# Altium PCB FRONT-UNIT-3.5.PcbDoc
Units mm, origin at the board's own origin, x right, y up, seen from the top; angles counter-clockwise.
Board outline 187 x 80.47 mm, 2 copper layers (Top Layer, Top, Bottom Layer, Bottom); 108 components, 75 nets, 427 pads, 124 vias.
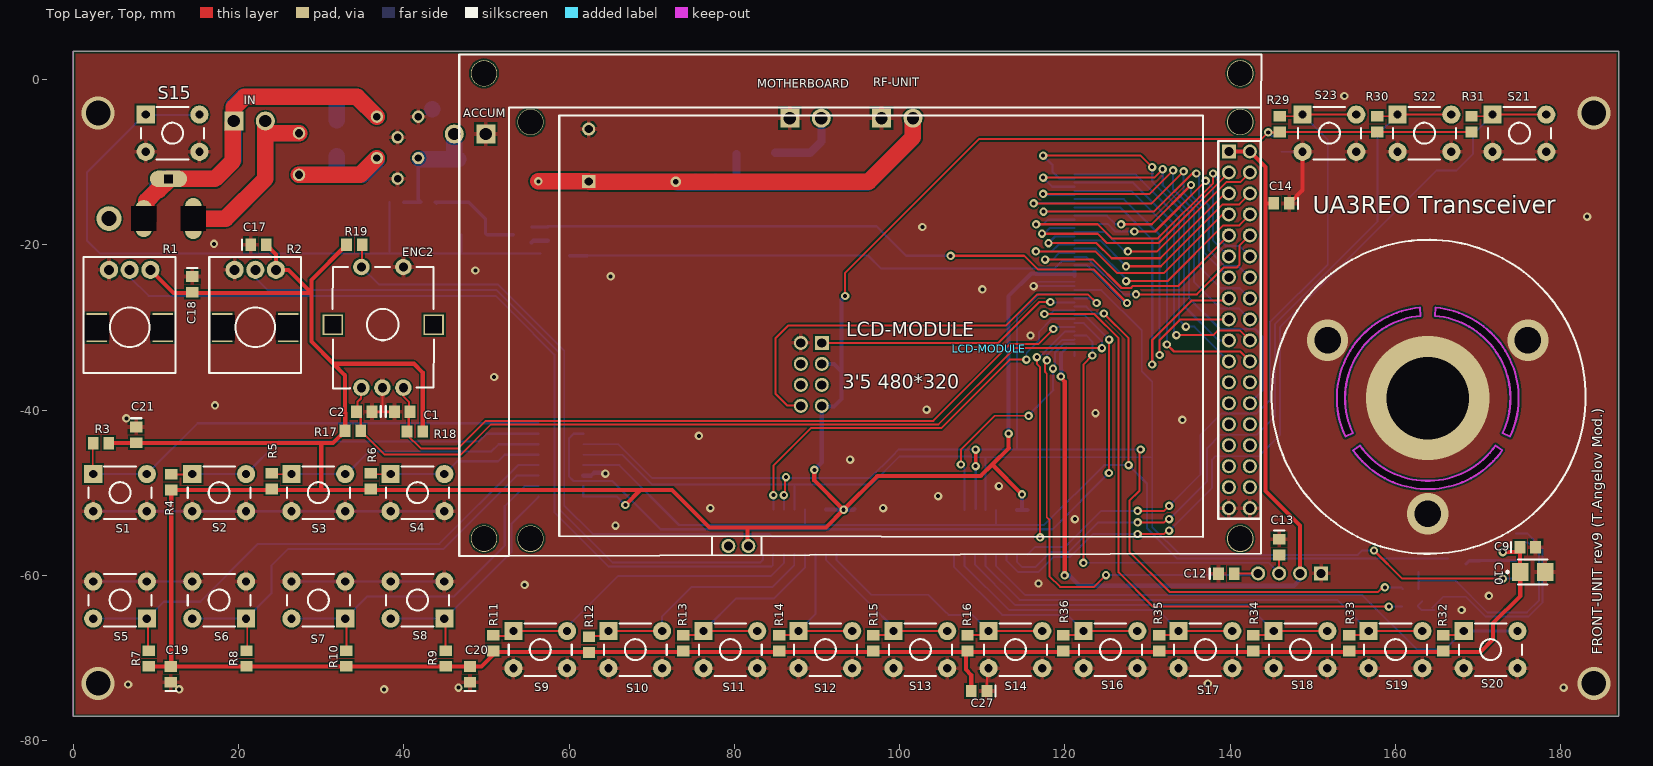
[diagram p0: Top Layer, Top view]
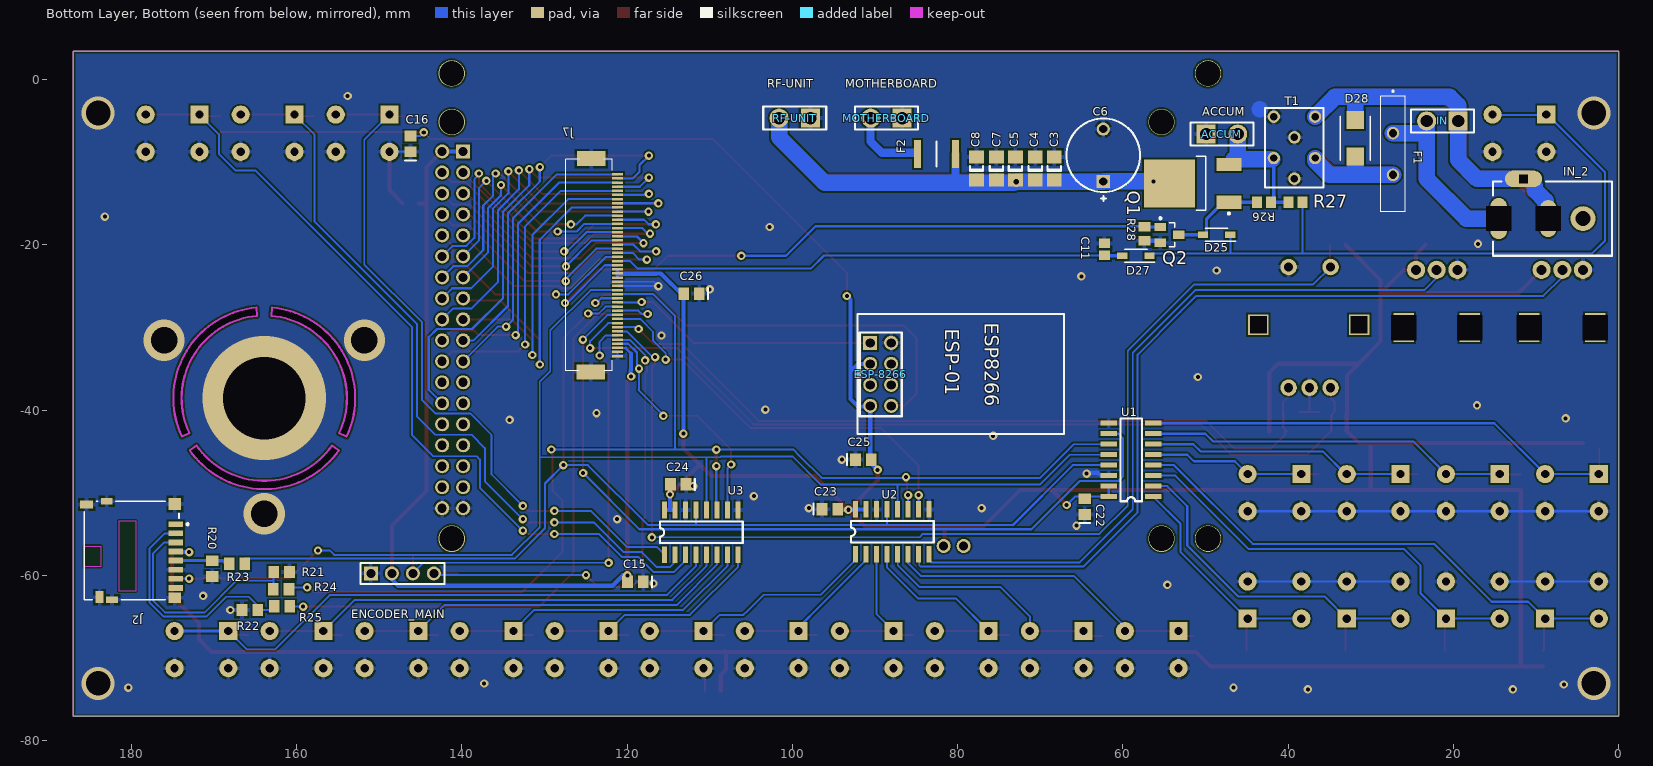
[diagram p1: Bottom Layer, Bottom view, seen from below]

## Layer stack, top to bottom
Top Solder, Top Mask: solder mask 0.0102, Solder Resist, Dk 3.5
Top Layer, Top: signal copper 0.0356
Dielectric 1: dielectric 0.32, FR-4, Dk 4.8
Bottom Layer, Bottom: signal copper 0.0356
Bottom Solder, Bot Mask: solder mask 0.0102, Solder Resist, Dk 3.5

## Board outline
0,-77.07 187,-77.07 187,3.4 0,3.4
cut-out: 154.889,-44.879 ccw(c163.9,-38.57) 172.911,-44.879 172.091,-44.306 cw(c163.9,-38.57) 155.708,-44.306
cut-out: 164.772,-28.608 cw(c163.9,-38.57) 172.963,-42.797 173.869,-43.219 ccw(c163.9,-38.57) 164.859,-27.612
cut-out: 153.931,-43.219 cw(c163.9,-38.57) 162.941,-27.612 163.028,-28.608 ccw(c163.9,-38.57) 154.837,-42.797

## Design rules (kind name [scope] priority, off if disabled: settings)
BoardOutlineClearance [All] p1: gap=0.2 ignorepadtopadclearanceinfootprint=FALSE except(0.4: Arc-SplitBarrior Arc-SplitContinuation Track-SplitBarrior Track-SplitContinuation SMDPad-SplitBarrior SMDPad-SplitContinuation THPad-SplitBarrior THPad-SplitContinuation Via-SplitBarrior Via-SplitContinuation Fill-SplitBarrior Fill-SplitContinuation Poly-SplitBarrior Poly-SplitContinuation Region-SplitBarrior Region-SplitContinuation Text-SplitBarrior Text-SplitContinuation)
Clearance [All] p1: gap=0.2 ignorepadtopadclearanceinfootprint=FALSE
Clearance "Clearance Bottom Layer" [OnLayer('Bottom Layer')] p2: gap=0.203 ignorepadtopadclearanceinfootprint=TRUE except(0.254: Arc-Text Track-Text SMDPad-Text THPad-Text Via-Text Fill-Text Poly-Text Region-Text Text-Text)
Clearance "Clearance Top Layer" [OnLayer('Top Layer')] p3: gap=0.203 ignorepadtopadclearanceinfootprint=TRUE except(0.254: Arc-Text Track-Text SMDPad-Text THPad-Text Via-Text Fill-Text Poly-Text Region-Text Text-Text)
HoleSize [All] p1: absolutevalues=TRUE maxlimit=21 minlimit=0.486 maxpercent=80.000 minpercent=20.000
MinimumAnnularRing [All] p1: minimumring=0.076
MinimumSolderMaskSliver [All] p1: minsoldermaskwidth=0.01
PolygonConnect PolygonConnect_1 [All] p1: thpad.connectstyle=Relief thpad.reliefconductorwidth=0.508 thpad.reliefentries=4 thpad.polygonreliefangle="90 Angle" thpad.airgapwidth=0.254 smdpad.connectstyle=Relief smdpad.reliefconductorwidth=0.508 smdpad.reliefentries=4 smdpad.polygonreliefangle="90 Angle" smdpad.airgapwidth=0.254 via.connectstyle=Direct via.reliefconductorwidth=0.508 via.reliefentries=4 via.polygonreliefangle="90 Angle" via.airgapwidth=0.254
RoomDefinition FRONT-UNIT-3.5 [InComponentClass('FRONT-UNIT-3.5')] p1: confinementstyle=ConfineIn formatcopy=TRUE lockcomponents=FALSE outline -1.4,-79 188.6,-79 188.6,5.8 -1.4,5.8
RoutingCorners [All] p1: cornerstyle=Round minsetback=2.54 maxsetback=2.54
RoutingVias [All] p1: holewidth=0.5 width=1 viastyle="Through Hole" minholewidth=0.2 minwidth=0.45 maxholewidth=1 maxwidth=2
SilkToSilkClearance [All] p1: silktosilkclearance=0.01
SilkToSolderMaskClearance [IsPad] p1: minsilkscreentomaskgap=0.1 clearancetoexposedcopper=TRUE
SolderMaskExpansion [All] p1: expansion=0.102 istentingtop=FALSE
Width [All] p1: maxlimit=2.54 minlimit=0.089 preferedwidth=0.381
25 further rules are at their usual default settings.

## Components (designator, comment, footprint, x,y, rotation, side; value= is the part's Value field where it differs from the comment)
ACCUM "JX2" JX2 48,-6.6 r180 bottom value=13.8V
C1 "100n" CAP_0805 39.6,-40.2 r0 top
C2 "100n" CAP_0805 35.4,-40.2 r180 top
C3 "1uF" CAP_1206 68.3,-10.77 r90 bottom
C4 "100n" CAP_1206 70.6,-10.77 r90 bottom
C5 "1n" CAP_1206 73,-10.77 r90 bottom
C6 "1000uF" CAP250RP 62.357,-9.722 r90 bottom
C7 "470p" CAP_1206 75.3,-10.77 r90 bottom
C8 "120p" CAP_1206 77.7,-10.77 r90 bottom
C9 "100n" CAP_0805 175.8,-56.6 r0 top
C10 "22uF 10V" EEEFC_sizeB 176.2,-59.6 r0 top
C11 "8.2n" CAPC2013X94X50LL20T25 62.23,-20.574 r270 bottom
C12 "10n" CAP_0805 139.319,-59.817 r0 top
C13 "10n" CAP_0805 145.923,-56.388 r270 top
C14 "100n" CAP_0805 146.4,-15 r180 top
C15 "100n" CAP_0805 118.8,-60.8 r0 bottom
C16 "100n" CAP_0805 146.2,-8 r90 bottom
C17 "100n" CAP_0805 22.2,-20 r0 top
C18 "100n" CAP_0805 14.395,-24.6 r270 top
C19 "100n" CAP_0805 11.8,-72.2 r90 top
C20 "100n" CAP_0805 48,-72.2 r90 top
C21 "100n" CAP_0805 7.6,-42.8 r270 top
C22 "100n" CAP_0805 64.6,-51.886 r90 bottom
C23 "100n" CAP_0805 95.65,-52 r180 bottom
C24 "100n" CAP_0805 113.6,-49 r0 bottom
C25 "100n" CAP_0805 91.6,-46 r180 bottom
C26 "100n" CAP_0805 112,-25.908 r0 bottom
C27 "100n" CAP_0805 109.8,-74 r180 top
D25 "1n4148w" SOD3716X135N 48.641,-18.796 r0 bottom
D27 "1n4148w" SOD3716X135N 58.42,-21.336 r0 bottom
D28 "SM6T15A" SMBJ36CATR 31.877,-7.112 r90 bottom
ENC2 "PEC12" PEC12 37.5,-30 r180 top
ENCODER_MAIN "OPTICAL ENCODER" 644456-4 147.19,-59.135 r180 bottom
ESP-8266 "ESP-01 ESP8266" "ESP-01 ESP8266" 79.629,-35.63 r270 bottom
F1 "RUEF400" RUEF400 27.305,-9.017 r270 bottom
F2 "MF-MSMF110_16-2" FUSC4632X85N 82.55,-9.017 r0 bottom
IN "JX2" JX2 21.336,-5.023 r0 bottom value=13.8V
IN_2 "PJ-050B" PJ-050B 8.159,-16.184 r0 bottom value=13.8V
J2 "DM3D-SF" HIRO-DM3D-SF_V 180,-57 r90 bottom
J7 "FPC-45P-0.5mm" FH12S45S05SH60 121.793,-22.479 r90 bottom
LCD-MODULE "ILI9486 480*320 3'5" LCD-MODULE-3.2-480-320 53.721,-3.37 r0 top
MOTHERBOARD "JX2" JX2 88.605,-4.67 r0 bottom value=13.8V
Q1 "IRFR9024NPBF" ONSC-DPAK-3-369C-01_V 51.562,-12.573 r0 bottom
Q2 "BSS123" FAIR-SOT23-3_V 54.356,-18.796 r270 bottom
R1 "ptv09a-4225f-b102" PTV09 6.8,-28.5 r180 top value="AF GAIN 1k"
R2 "ptv09a-4225f-b102" PTV09 22,-28.5 r180 top value="SHIFT 1k"
R3 "4.7k" RES_0805 3.345,-44 r0 top
R4 "4.7k" RES_0805 11.845,-48.72 r270 top
R5 "4.7k" RES_0805 24,-48.6 r270 top
R6 "4.7k" RES_0805 36,-48.6 r270 top
R7 "4.7k" RES_0805 9.145,-70.07 r270 top
R8 "4.7k" RES_0805 20.945,-70.07 r270 top
R9 "4.7k" RES_0805 45.045,-70.07 r270 top
R10 "4.7k" RES_0805 33.045,-70.07 r270 top
R11 "4.7k" RES_0805 50.8,-68.2 r270 top
R12 "4.7k" RES_0805 62.4,-68.4 r270 top
R13 "4.7k" RES_0805 73.8,-68.2 r270 top
R14 "4.7k" RES_0805 85.4,-68.2 r270 top
R15 "4.7k" RES_0805 96.8,-68.2 r270 top
R16 "4.7k" RES_0805 108.2,-68.2 r270 top
R17 "4.7k" RES_0805 33.831,-42.518 r180 top
R18 "4.7k" RES_0805 41.323,-42.596 r0 top
R19 "4.7k" RES_0805 34,-20 r180 top
R20 "3.3k" RES_0805 170.2,-59.2 r90 bottom
R21 "3.3k" RES_0805 161.8,-59.6 r0 bottom
R22 "3.3k" RES_0805 165.65,-64.2 r180 bottom
R23 "0" RES_0805 167.2,-58.6 r180 bottom
R24 "0" RES_0805 161.85,-61.67 r180 bottom
R25 "0" RES_0805 161.75,-63.77 r180 bottom
R26 "30k" RESC2013X60X40NL20T25 42.926,-14.859 r180 bottom
R27 "30k" RESC2013X60X40NL20T25 39.116,-14.859 r0 bottom
R28 "30k" RESC2013X60X40NL20T25 57.404,-18.669 r90 bottom
R29 "4.7k" RES_0805 146,-5.4 r270 top
R30 "4.7k" RES_0805 157.8,-5.4 r270 top
R31 "4.7k" RES_0805 169.2,-5.4 r270 top
R32 "4.7k" RES_0805 165.8,-68.2 r270 top
R33 "4.7k" RES_0805 154.4,-68.2 r270 top
R34 "4.7k" RES_0805 142.8,-68.2 r270 top
R35 "4.7k" RES_0805 131.4,-68.2 r270 top
R36 "4.7k" RES_0805 119.8,-68.2 r270 top
RF-UNIT "JX2" JX2 99.7,-4.67 r0 bottom value=13.8V
S1 "PTS645SK50LFS" PTS645SK50LFS 5.645,-50 r0 top
S2 "PTS645SK50LFS" PTS645SK50LFS 17.645,-50 r0 top
S3 "PTS645SK50LFS" PTS645SK50LFS 29.645,-50 r0 top
S4 "PTS645SK50LFS" PTS645SK50LFS 41.645,-50 r0 top
S5 "PTS645SK50LFS" PTS645SK50LFS 5.645,-63 r180 top
S6 "PTS645SK50LFS" PTS645SK50LFS 17.645,-63 r180 top
S7 "PTS645SK50LFS" PTS645SK50LFS 29.645,-63 r180 top
S8 "PTS645SK50LFS" PTS645SK50LFS 41.645,-63 r180 top
S9 "PTS645SK50LFS" PTS645SK50LFS 56.5,-69 r0 top
S10 "PTS645SK50LFS" PTS645SK50LFS 68,-69 r0 top
S11 "PTS645SK50LFS" PTS645SK50LFS 79.5,-69 r0 top
S12 "PTS645SK50LFS" PTS645SK50LFS 91,-69 r0 top
S13 "PTS645SK50LFS" PTS645SK50LFS 102.5,-69 r0 top
S14 "PTS645SK50LFS" PTS645SK50LFS 114,-69 r0 top
S15 "PTS645SK50LFS" PTS645SK50LFS 12,-6.5 r0 top value=PWR
S16 "PTS645SK50LFS" PTS645SK50LFS 125.5,-69 r0 top
S17 "PTS645SK50LFS" PTS645SK50LFS 137,-69 r0 top
S18 "PTS645SK50LFS" PTS645SK50LFS 148.5,-69 r0 top
S19 "PTS645SK50LFS" PTS645SK50LFS 160,-69 r0 top
S20 "PTS645SK50LFS" PTS645SK50LFS 171.5,-69 r0 top
S21 "PTS645SK50LFS" PTS645SK50LFS 175,-6.5 r0 top
S22 "PTS645SK50LFS" PTS645SK50LFS 163.5,-6.5 r0 top
S23 "PTS645SK50LFS" PTS645SK50LFS 152,-6.5 r0 top
T1 "BNX016-01" TRANSF_ICORE 39.243,-8.255 r270 bottom
U1 "MCP3008-I/SL" MCP3008-I/SL 59,-46.044 r0 bottom
U2 "MCP3008-I/SL" MCP3008-I/SL 87.884,-54.737 r90 bottom
U3 "MCP3008-I/SL" MCP3008-I/SL 111,-54.8 r90 bottom

## Footprints (in the part's own frame and the unit in brackets; to place one, negate y for a bottom-side part, rotate by r counter-clockwise, add the part's x,y. Pads: shape width x height; smd on the part's side, far side on the other; paste and mask are expansions set on the pad)
644456-4 [mm]
  rect 1.7x1.7 hole 1.1: 1(-3.81,-0.635)
  round 1.7 hole 1.1: 2(-1.27,-0.635) 3(1.27,-0.635) 4(3.81,-0.635)
  silkscreen extent -5.08,-1.9 5.08,0.64
CAP250RP [mm]
  rect 1.6x1.6 hole 1: 1(-2.631,0)
  round 1.6 hole 1: 2(3.719,0)
  silkscreen extent -4.99,-4.45 4.99,4.45
CAP_0805 [mm]
  rect 1.3x1.5 smd: 1(-0.75,0) 2(1.15,0)
  silkscreen extent -1.8,-0.65 -1.8,0.65
CAP_1206 [mm]
  rect 1.6x1.8 smd: 1(-1.4,0) 2(1.4,0)
  silkscreen extent -0.3,-0.8 0.3,0.8
CAPC2013X94X50LL20T25 [mm] "Chip Capacitor, 2-Leads, Body 2.01x1.25mm, IPC High Density"
  rect 1.15x1.35 smd: 1(-0.725,0) 2(0.725,0)
  body extent -1.1,-0.72 1.1,0.72, height 0.94
EEEFC_sizeB [mm]
  rect 2x2.2 smd: 1(-1.1,0) 2(1.9,0)
  silkscreen extent -2.9,-1.5 2.2,1.5
"ESP-01 ESP8266" [mm]
  round 1.7 hole 1.1: 1(-3.76,-8.4) 2(-1.22,-8.4) 3(1.32,-8.4) 4(3.86,-8.4) 6(-1.22,-10.94) 7(1.32,-10.94) 8(3.86,-10.94)
  rect 1.7x1.7 hole 1.1: 5(-3.76,-10.94)
  silkscreen extent -7.25,-12.5 7.25,12.5
FAIR-SOT23-3_V [mm] "SOT23, 3-Leads, Body 2.92x1.3mm, Pitch 0.95mm"
  rect 1x1.4 smd: 1(-0.95,-1.1) 2(0.95,-1.1) 3(0,1.1)
  silkscreen extent -2.12,-1.23 1.46,0.65, body extent -1.46,-0.65 1.46,0.65, height 1.2
FH12S45S05SH60 [mm]
  rect 0.3x1.3 smd: 1(11,-0.65) 2(10.5,-0.65) 3(10,-0.65) 4(9.5,-0.65) 5(9,-0.65) 6(8.5,-0.65) 7(8,-0.65) 8(7.5,-0.65) 9(7,-0.65) 10(6.5,-0.65) 11(6,-0.65) 12(5.5,-0.65) 13(5,-0.65) 14(4.5,-0.65) 15(4,-0.65) 16(3.5,-0.65) 17(3,-0.65) 18(2.5,-0.65) 19(2,-0.65) 20(1.5,-0.65) 21(1,-0.65) 22(0.5,-0.65) 23(0,-0.65) 24(-0.5,-0.65) 25(-1,-0.65) 26(-1.5,-0.65) 27(-2,-0.65) 28(-2.5,-0.65) 29(-3,-0.65) 30(-3.5,-0.65) 31(-4,-0.65) 32(-4.5,-0.65) 33(-5,-0.65) 34(-5.5,-0.65) 35(-6,-0.65) 36(-6.5,-0.65) 37(-7,-0.65) 38(-7.5,-0.65) 39(-8,-0.65) 40(-8.5,-0.65) 41(-9,-0.65) 42(-9.5,-0.65) 43(-10,-0.65) 44(-10.5,-0.65) 45(-11,-0.65)
  rect 1.8x3.5 smd: 46(-12.9,2.6) 47(12.9,2.54)
  silkscreen extent -12.8,0 12.8,5.6, body extent -13.62,-5.6 13.62,1.27, height 2.1
FUSC4632X85N [mm]
  rect 0.85x3.43 smd: 1(-2.3,0) 2(2.3,0)
  silkscreen extent 0,-1.52 0,1.52, body extent -2.27,-1.62 2.27,1.62, height 0.85
HIRO-DM3D-SF_V [mm] "SMD, 8-Leads, Body 11.95x11.45mm"
  rect 0.7x1.75 smd: 1(3.175,-5.4) 2(2.075,-5.4) 3(0.975,-5.4) 4(-0.125,-5.4) 5(-1.225,-5.4) 6(-2.325,-5.4) 7(-3.425,-5.4) 8(-4.525,-5.4)
  rect 1x1.55 smd: 9(5.575,5.4)
  rect 1.45x1 smd: 10(-5.65,3.825)
  rect 0.8x1.4 smd: 11(5.975,2.975)
  rect 0.8x1.5 smd: 12(-5.975,2.325)
  rect 1.3x1.5 smd: 13(-5.725,-5.275)
  rect 1.5x1.5 smd: 14(5.625,-5.275)
  Top Layer, Top keep-out region: -4.925,1.475 3.575,1.475 3.575,-0.525 -4.925,-0.525
  Top Layer, Top keep-out region: -1.975,5.675 0.525,5.675 0.525,3.675 -1.975,3.675
  silkscreen extent -5.97,-6.95 5.97,5.68, body extent -5.97,-5.77 5.97,5.67, height 1.55
JX2 [mm]
  rect 2.3x2.3 hole 1.5: 1(-1.905,0)
  round 2.3 hole 1.5: 2(1.905,0)
  silkscreen extent -3.81,-1.4 3.81,1.4
LCD-MODULE-3.2-480-320 [mm]
  rect 1.7x1.7 hole 1.1: 1(86.106,-5.334)
  round 1.7 hole 1.1: 2(88.646,-5.334) 3(86.106,-7.874) 4(88.646,-7.874) 5(86.106,-10.414) 6(88.646,-10.414) 7(86.106,-12.954) 8(88.646,-12.954) 9(86.106,-15.494) 10(88.646,-15.494) 11(86.106,-18.034) 12(88.646,-18.034) 13(86.106,-20.574) 14(88.646,-20.574) 15(86.106,-23.114) 16(88.646,-23.114) 17(86.106,-25.654) 18(88.646,-25.654) 19(86.106,-28.194) 20(88.646,-28.194) 21(86.106,-30.734) 22(88.646,-30.734) 23(86.106,-33.274) 24(88.646,-33.274) 25(86.106,-35.814) 26(88.646,-35.814) 27(86.106,-38.354) 28(88.646,-38.354) 29(86.106,-40.894) 30(88.646,-40.894) 31(86.106,-43.434) 32(88.646,-43.434) 33(86.106,-45.974) 34(88.646,-45.974) 35(86.106,-48.514) 36(88.646,-48.514) 37(25.54,-53.086) 38(27.956,-53.086)
  silkscreen extent -1,-54.3 90,0
MCP3008-I/SL [mm]
  rect 2x0.6 smd: 1(-2.7,4.445) 2(-2.7,3.175) 3(-2.7,1.905) 4(-2.7,0.635) 5(-2.7,-0.635) 6(-2.7,-1.905) 7(-2.7,-3.175) 8(-2.7,-4.445) 9(2.7,-4.445) 10(2.7,-3.175) 11(2.7,-1.905) 12(2.7,-0.635) 13(2.7,0.635) 14(2.7,1.905) 15(2.7,3.175) 16(2.7,4.445)
  silkscreen extent -1.3,-5 1.3,5
ONSC-DPAK-3-369C-01_V [mm] "DPAK, 3-Leads, Body 6.54x6.095mm, Pitch 2.29mm"
  rect 3x1.6 smd: 1(-4.4,2.29) 3(-4.4,-2.29)
  rect 6.2x5.8 smd: 4(2.8,0)
  silkscreen extent -4.52,-3.27 -0.45,3.76, body extent -1.6,-3.27 4.49,3.27, height 2.38
PEC12 [mm]
  round 2 hole 1.1: 1(-2.44,-7.302) 2(2.64,-7.302) 3(2.64,7.302) 4(0.1,7.302) 5(-2.44,7.302)
  rect 2.5x2.5 hole 2 square: 6(-6.1,-0.318) 7(6.1,-0.317)
  silkscreen extent -6.12,-7.32 6.12,7.38
PJ-050B [mm]
  oval 2x5 hole 3 square: 1(6.35,0.65)
  oval 2x4.5 hole 3 square: 2(0.35,0.65)
  oval 4.5x2 hole 1 square: 3(3.35,-4.15)
  round 3 hole 1.8: 4(-3.85,0.65)
  silkscreen extent -7.35,-3.85 7.05,5.15
PTS645SK50LFS [mm]
  rect 2.2x2.2 hole 1: 1(-3.25,2.25)
  round 2.2 hole 1: 2(3.25,2.25) 3(3.25,-2.25) 4(-3.25,-2.25)
  silkscreen extent -3.81,-3.17 3.81,3.18
PTV09 [mm]
  round 2.2 hole 1.2: 1(-2.515,-5.465) 2(-0.015,-5.465) 3(2.485,-5.465)
  rect 2.5x3.5 hole 3 square: 4(-4.015,1.535) 5(3.985,1.535)
  silkscreen extent -5.56,-7.03 5.56,7.03
RES_0805 [mm]
  rect 1.3x1.5 smd: 1(-0.95,0) 2(0.95,0)
RESC2013X60X40NL20T25 [mm] "Chip Resistor, 2-Leads, Body 2.00x1.25mm, IPC Medium Density"
  rect 1.2x1.45 smd: 1(-0.85,0) 2(0.85,0)
  body extent -1.1,-0.72 1.1,0.72, height 0.6
RUEF400 [mm]
  round 1.515 hole 1.01: 1(-2.525,0) 2(2.525,0)
  silkscreen extent -7.7,-1.5 7,1.5, body extent -7,-1.5 7,1.5, height 19.1
SMBJ36CATR [mm]
  rect 2.2x2.15 smd: 1(-2.2,0) 2(2.2,0)
  silkscreen extent -2.68,-1.81 2.68,1.81, body extent -3.09,-1.81 3.09,1.81, height 2.75
SOD3716X135N [mm]
  rect 1.25x0.75 smd: 1(-1.65,0) 2(1.65,0)
  silkscreen extent -2.27,-0.77 1.35,0.77, body extent -1.85,-0.78 1.85,0.77, height 1.35
TRANSF_ICORE [mm]
  round 1.5 hole 0.9: LCG1(-1.25,0.01) LCG2(3.75,0.01) LCG3(-3.75,-2.49) LCP(1.25,-2.49) P(1.25,2.51) PSG(-3.75,2.51)
  silkscreen extent -4.81,-3.54 4.81,3.54

## Part data
C1 C2 C9 C12 C13 C14 C15 C16 C17 C18 C19 C20 C21 C22 C23 C24 C25 C26 C27: library part CAP_0805, "CAP_0805"
C3 C4 C5 C7 C8: library part CAP_1206, "CAP_1206"
C6: library part CAP250RP, "CAP250RP"
C10: library part EEEFC_sizeB, "EEEFC_sizeB"
C11: library part CMP-2007-04444-1, "CAP_1206", Manufacturer="AVX Interconnect / Elco", Part Number=08055C822KAT2A
D25 D27: "Diode", Manufacturer_Name=Vishay, Datasheet Link=http://www.vishay.com/docs/85748/1n4148w.pdf, Height=1.35mm, Manufacturer_Part_Number=1n4148w
D28: "Diode", Manufacturer_Name=STMicroelectronics, Mouser Part Number=511-SM6T15A, RS Part Number=4864915P, Allied_Number=70390432, Allied Price/Stock=http://www.alliedelec.com/stmicroelectronics-sm6t15a/70390432/, Datasheet Link=http://www.st.com/web/en/resource/technical/document/datasheet/CD00000725.pdf, Height=2.65mm, Manufacturer_Part_Number=SM6T15A, Mouser Price/Stock=https://www.mouser.com/Search/Refine.aspx?Keyword=511-SM6T15A, RS Price/Stock=http://uk.rs-online.com/web/p/products/4864915P
ENCODER_MAIN: library part 644456-4
F1: "Fuse", Manufacturer_Name=LITTELFUSE, Mouser Part Number=650-RUEF400, RS Part Number=5176837P, Datasheet Link=https://componentsearchengine.com/Datasheets/1/RUEF400.pdf, Height=19mm, Manufacturer_Part_Number=RUEF400, Mouser Price/Stock=https://www.mouser.co.uk/ProductDetail/Littelfuse/RUEF400?qs=hv6pn79dJPQHuFVnpNF%2FDg%3D%3D, RS Price/Stock=http://uk.rs-online.com/web/p/products/5176837P
F2: "Fuse", Manufacturer_Name=Bourns, Manufacturer_Part_Number=MF-MSMF110/16-2, Mouser Part Number=652-MF-MSMF110/16-2, RS Part Number=6478207P, Allied_Number=70153434, Allied Price/Stock=https://www.alliedelec.com/bourns-mf-msmf110-16-2/70153434/, Datasheet Link=https://componentsearchengine.com/Datasheets/2/MF-MSMF110_16-2.pdf, Height=0.85mm, Mouser Price/Stock=https://www.mouser.co.uk/ProductDetail/Bourns/MF-MSMF110-16-2?qs=wksszfECgvir54ST3ixUHA%3D%3D, RS Price/Stock=http://uk.rs-online.com/web/p/products/6478207P
J2: library part CMP-2000-06166-1, "Micro SD Card Connector, Push-Pull, Top Board Mounting, 125 V, 0.5 A, -25 to 85 degC, 8-Pin SMD, RoHS, Tape and Reel", Manufacturer="Hirose Electric", Package Description="8-Pin Surface Mount Device, Body 11.95 x 11.45 mm", Standard Package=1, Card Type=SecureDigital-microSD™, Catalog Drawings=DM3D-SF, Category=Connectors,Interconnects, Connector Type=Connector, Contact Finish=Gold, Contact Finish Thickness=-, Datasheet URL=https://datasheet.ciiva.com/11755/0900766b80fd13c1-11755152.pdf, Datasheet Version=06/2010, Ejector Side=-, Family=MemoryConnectors-PCCardSockets, Featured Product=dm3d-series, Features=Switch, Height Above Board="0.061\"(1.55mm)", HTML Datasheet=DM3SeriesmicroSD.html, Insertion, Removal Method=PushIn,PullOut, Manufacturer URL=https://www.hirose.com, Mounting Feature=Normal,Standard-Top, Mounting Technology=SurfaceMount, Mounting Type=SurfaceMount,RightAngle, Number of Positions=10(8+2), Online Catalog=DM3Series, Other Names=HR1941CT, Package Reference=DM3D-SF, Packaging=CutTape(CT), Product Training Modules=DM3SeriesmicroSDCardSockets, Series=DM3
J7: library part FH12S-45S-0.5SH_55_, "Connector", Manufacturer_Name=Hirose, Manufacturer_Part_Number=FH12S-45S-0.5SH(55), Mouser Part Number=798-FH12S-45S-05SH55, RS Part Number=1620942, Datasheet Link=https://www.hirose.com/product/en/download_file/key_name/FH12S-45S-0.5SH%2855%29/category/Drawing%20(2D)/doc_file_id/43881/?file_category_id=6&item_id=05860665055&is_series=, Height=2mm, Mouser Price/Stock=https://www.mouser.co.uk/ProductDetail/Hirose-Connector/FH12S-45S-05SH55?qs=0N%252BVULUZFj%252BE0LA99Ny0NA%3D%3D, RS Price/Stock=http://uk.rs-online.com/web/p/products/1620942
LCD-MODULE: library part LCD-MODULE_3'2_480х320, "LCD-MODULE_3'2_480х320"
Q1: library part CMP-1058-00387-1, "IRFR9024NPBF, Транзистор, Р-канал 55В 11А", Manufacturer="On Semiconductor", Package Type="DPAK-3, IPAK-4", PartNumber=NTD2955G, Channel Polarity="P Channel", Ciss Typ (pF)=500, ComponentLink1Description="Manufacturer URL", ComponentLink1URL=http://www.onsemi.com/, ComponentLink2Description=Datasheet, ComponentLink2URL=http://www.onsemi.cn/pub_link/Collateral/NTD2955-D.PDF, ComponentLink3Description="Package Specification", ComponentLink3URL=http://www.onsemi.cn/pub_link/Collateral/369C.PDF, Configuration=Single, Coss Typ (pF)=150, Crss Typ (pF)=50, DatasheetVersion="Rev. 13", ID Max (A)=12, Mounting Technology="Surface Mount", PackageDescription="3-Pin Flange Mount, Body 6.54 x 6.095 mm, Pitch 2.29 mm", PackageReference=DPAK-3-369C-01, PackageVersion="Rev. E, 02/2014", Packing="Tape and Reel", PD Max (W)=55, Qrr Typ (nC)=100, RoHS=Pb-Free, V(BR)DSS Min (V)=60, VGS(th) Max (V)=4, VGS Max (V)=20
Q2: library part CMP-2000-04934-1, "N-Channel Logic Level Enhancement Mode Field Effect Transistor, 1.7 V, -55 to 150 degC, 3-Pin SOT-23, RoHS, Tape and Reel", Manufacturer=Fairchild, Maximum Continuous Drain Current=0.17A, Maximum Drain Source Voltage=100V, Maximum Gate Source Voltage=±20V, Operating Temperature=-55to150degC, Package=3SOT-23, Package Description="3-Pin Small Outline Transistor, Body 2.92 x 1.325 mm, Pitch 0.95 mm", Package Reference=SOT23-3, Package Version="Rev. 12, 03/2016", Category=MOSFET, Channel Mode=Enhancement, Channel Type=N, Datasheet URL=https://www.fairchildsemi.com/datasheets/BS/BSS123.pdf, Datasheet Version=Jun-03, Manufacturer URL=https://www.fairchildsemi.com/, Mounting=SurfaceMount, Package URL=http://www.fairchildsemi.com/dwg/MA/MA03D.pdf, Packaging=Tape&Reel, Rad Hard=No, RDS-on=6000@10VmOhm, Typical Fall Time=2.4ns, Typical Rise Time=9ns, Typical Turn-Off Delay Time=17ns, Typical Turn-On Delay Time=1.7ns
R1 R2: library part PTV09, "Adjustable Resistor PTV09"
R3 R4 R5 R6 R7 R8 R9 R10 R11 R12 R13 R14 R15 R16 R17 R18 R19 R20 R21 R22 R23 R24 R25 R29 R30 R31 R32 R33 R34 R35 R36: library part RES_0805, "RES_0805"
R26 R27 R28: library part CMP-2001-00626-1, "RES_0805", Manufacturer=Panasonic, Part Number=ERA-6AEB303V
S1: LCSC Part #=test
T1: library part TRANSF_ICORE
ENC2: FULLNAME="Выключатель замыкающий с приводом нажатием кнопки"

## Free pads (board coordinates)
  round 3.2 hole 3: 0(49.691,-55.567) 0(49.691,0.733) 0(141.221,0.733)

## Via types
v1: diameter 1.016, hole 0.486, Top Layer, Top to Bottom Layer, Bottom, tented both sides, 111 vias
v2: diameter 3.2, hole 3, Top Layer, Top to Bottom Layer, Bottom, 4 vias
v3: diameter 4, hole 3, Top Layer, Top to Bottom Layer, Bottom, 4 vias
v4: diameter 5, hole 3.2, Top Layer, Top to Bottom Layer, Bottom, 3 vias
v5: diameter 1.27, hole 0.711, Top Layer, Top to Bottom Layer, Bottom, tented both sides, 1 vias
v6: diameter 15, hole 10, Top Layer, Top to Bottom Layer, Bottom, 1 vias

## Nets (pads, with @x,y where several pads share a name; then routed paths per layer and width w, separated by ;. In a path a pad name is that pad's centre, name@x,y a point inside that pad or via, vN(x,y) a via of type N, cw(c..) or ccw(c..) an arc to the next point about the centre after c; other vN are vias at no path point)
+3V3: C9.1 C10.1 C16.2 C17.2 C18.2 C19.2 C20.2 C21.2 C22.2 C23.2 C24.2 C25.2 C26.2 C27.2 ESP-8266.6 ESP-8266.8 J2.4 J7.24 J7.25 J7.26 LCD-MODULE.38 R1.1 R2.1 R3.2 R4.2 R5.2 R6.2 R7.2 R8.2 R9.2 R10.2 R11.2 R12.2 R13.2 R14.2 R15.2 R16.2 R17.2 R18.2 R19.2 R29.2 R30.2 R31.2 R32.2 R33.2 R34.2 R35.2 R36.2 U1.15 U1.16 U2.15 U2.16 U3.15 U3.16 | length 593.5
  Top Layer, Top w0.23: v1(93.4,-26.2) 93.4,-23.4 109.6,-7.2 143.8,-7.2 v1(144.6,-6.4) 145.95,-6.4 R29.2 R30.2 R31.2
  Top Layer, Top w0.5: R3.2 30,-44 ; R7.2 11.845,-71.02 R4.2 30.2,-49.67 ; R1.1 12.103,-25.823 28.8,-25.823 ; C19.2@11.866,-71.02 R8.2 R10.2 R9.2 49.4,-71.02 51.15,-69.27 R16.2@108.08,-69.27 ; C17.2 24.515,-21.165 R2.1 26.012,-23.035 28.8,-25.823 ; R19.2 28.8,-24.25 28.8,-25.823 ; R18.2 42.273,-35.473 41.2,-34.4 31.493,-34.4 ; v1@66.6,-51.6 v1@66.75,-51.45 ; v1(66.8,-51.5) 68.6,-49.7 68.6,-49.67 ; LCD-MODULE.38 81.6,-56.379 81.6,-54.21 ; v1(89.662,-47.244) 89.662,-48.514 v1(93.218,-52.07) ; R16.2 R16.2@108.08,-69.27 ; C27.2 108.65,-72.05 108,-71.4 108,-69.35 R16.2@108.08,-69.27 ; v1(113.173,-42.868) 113.173,-44.573 113.2,-44.6 111.2,-46.6 ; v1(114.8,-50.2) 111.2,-46.6 ; v1(173,-57.2) 175.05,-57.2 175.05,-59.55 C10.1 175.1,-62.5 171.8,-65.8 171.8,-67.741 170.27,-69.27 R16.2@108.08,-69.27 ; 28.8,-25.823 28.8,-31.707 31.493,-34.4 ; 30,-44 31.423,-44 32.905,-42.518 32.905,-40.33 32.893,-40.33 32.893,-35.8 31.493,-34.4 ; 30,-44 30,-49.47 30.2,-49.67 ; 30.2,-49.67 68.6,-49.67 ; 68.6,-49.67 72.46,-49.67 77,-54.21 81.6,-54.21 ; 81.6,-54.21 91.078,-54.21 v1(93.218,-52.07) ; v1(93.218,-52.07) 97.288,-48 109.8,-48 111.2,-46.6
  Bottom Layer, Bottom w0.23: v1(144.6,-6.4) 145.05,-6.85 C16.2 ; J2.4@174.525,-57.2 J2.4
  Bottom Layer, Bottom w0.254: U1.15 U1.16 65.789,-50.489 v1(66.8,-51.5)
  Bottom Layer, Bottom w0.5: v1(89.662,-47.244) 90.569,-46.337 90.569,-39.803 90.805,-39.567 92.046,-39.567 92.964,-38.65 92.964,-35.328 ; ESP-8266.6@90.805,-34.41 92.046,-34.41 92.964,-35.328 ; U2.15 U2.16 92.362,-52.07 v1(93.218,-52.07) 94.43,-52.07 C23.2 ; v1(93.4,-26.2) 92.964,-26.636 92.964,-35.328 ; v1(113.173,-42.868) 113.173,-26.227 115.921,-23.479 116.478,-23.479 116.509,-23.51 121.112,-23.51 J7.25 ; U3.15 114.81,-52.1 ; v1(114.8,-50.2) 114.8,-52.09 114.81,-52.1 ; U3.16 114.81,-52.1 ; 121.143,-23.749 J7.25 ; 121.143,-23.241 J7.25 ; v1(173,-57.2) J2.4@174.525,-57.2
+5: C14.2 C15.2 ENCODER_MAIN.2 J7.43 LCD-MODULE.1 LCD-MODULE.2 | length 118.7
  Top Layer, Top w0.5: v1(119.507,-35.941) 119.507,-36.081 119.965,-36.539 v1(119.965,-60) ; LCD-MODULE.1 LCD-MODULE.2@142.299,-8.704 ; LCD-MODULE.2@142.24,-8.646 LCD-MODULE.2@142.299,-8.704 ; LCD-MODULE.2@142.333,-8.739 LCD-MODULE.2@142.299,-8.704 ; LCD-MODULE.2 LCD-MODULE.2@142.299,-8.704 ; LCD-MODULE.2@142.46,-8.797 144.272,-10.609 144.272,-15 ; C14.2 144.272,-15 ; ENCODER_MAIN.2 148.46,-53.972 144.272,-49.784 144.272,-15
  Bottom Layer, Bottom w0.25: 120.164,-32.49 120.175,-32.479 J7.43
  Bottom Layer, Bottom w0.3: 119.507,-33.147 120.164,-32.49
  Bottom Layer, Bottom w0.5: v1(119.507,-35.941) 119.558,-35.89 119.558,-35.2 ; 119.507,-35.2 119.507,-33.147 ; v1(119.965,-60) 120.509,-60 121.779,-61.27 147.7,-61.27 148.5,-60.47 148.5,-60.431 148.46,-60.391 ENCODER_MAIN.2 ; LCD-MODULE.1 LCD-MODULE.2
+12: C3.1 C4.1 C5.1 C6.1 C7.1 C8.1 F2.1 Q1.4 RF-UNIT.2 | length 104.9
  Top Layer, Top w2: v1(56.261,-12.319) 62.322,-12.319 C6.1 62.374,-12.37 v5(72.9,-12.37) 96.23,-12.37 101.605,-6.995 RF-UNIT.2
  Bottom Layer, Bottom w0.254: C5.1@72.817,-12.354 C5.1
  Bottom Layer, Bottom w0.381: 80.137,-12.52 80.25,-12.407 ; 85.965,-12.135 86.35,-12.52
  Bottom Layer, Bottom w1: 80.25,-12.407 F2.1
  Bottom Layer, Bottom w1.6: C7.1@75.3,-12.52 C7.1 ; C8.1 C8.1@77.807,-12.52
  Bottom Layer, Bottom w2: v1(56.261,-12.319) 62.322,-12.319 C6.1 C5.1@72.817,-12.354 ; v5(72.9,-12.37) 73.188,-12.52 75.3,-12.52 77.807,-12.52 80.137,-12.52 86.35,-12.52 96.08,-12.52 101.605,-6.995 RF-UNIT.2
AD1_CS: J7.35 U1.10 | length 98.9
  Top Layer, Top w0.254: v1(125.308,-47.625) 125.329,-47.605 125.329,-31.516 v1(125.349,-31.496)
  Bottom Layer, Bottom w0.254: U1.10 60.531,-42.869 60,-43.4 60,-48.063 60.526,-48.589 65.205,-48.589 71.047,-54.431 118.502,-54.431 v1(125.308,-47.625) ; J7.35 122.332,-28.479 v1(125.349,-31.496)
AD2_CS: J7.36 U2.10 | length 50.2
  Top Layer, Top w0.23: v1(84.709,-50.292) 84.709,-46.736 89.245,-42.2 105,-42.2 113.291,-33.909 v1(115.316,-33.909)
  Bottom Layer, Bottom w0.23: U2.10 v1(84.709,-50.292) ; v1(115.316,-33.909) 115.316,-33.147 116.84,-31.623 116.84,-30.56 118.421,-28.979 J7.36
AD3_CS: J7.42 U3.10 | length 29.2
  Top Layer, Top w0.23: v1(107.4,-46.6) 107.4,-44.8 111.5,-40.7 v1(115.6,-40.7)
  Bottom Layer, Bottom w0.23: v1(107.4,-46.6) 107.825,-47.025 U3.10
  Bottom Layer, Bottom w0.254: v1(115.6,-40.7) 115.6,-40.6 118.6,-37.6 118.549,-37.549 v1(118.549,-35) 118.8,-34.749 118.8,-33.038 119.859,-31.979 J7.42
CLK: J7.33 R23.2 U1.13 U2.13 U3.13 | length 145.7
  Top Layer, Top w0.254: v1(124.714,-28.321) 127.696,-31.303 v1(127.696,-46.67)
  Bottom Layer, Bottom w0.23: 73.298,-53.915 88.519,-53.915 111.6,-53.915 ; U3.13 111.635,-53.88 111.6,-53.915 ; J7.33 122.596,-27.479 123.438,-28.321 v1(124.714,-28.321) ; 124.73,-46.67 117.485,-53.915 111.6,-53.915
  Bottom Layer, Bottom w0.254: U1.13 66.062,-46.679 73.298,-53.915 ; 88.519,-53.915 U2.13 ; 124.73,-46.67 v1(127.696,-46.67) 129.921,-48.895 129.921,-54.299 133.604,-57.982 R23.2@166.37,-57.982
CPU_PW_HOLD: J7.23 Q2.1 R28.2 | length 84.2
  Top Layer, Top w0.254: v1(106.172,-21.336) 115.062,-21.336 116.713,-22.987 123.444,-22.987 v1(127.508,-27.051)
  Bottom Layer, Bottom w0.254: R28.2@57.404,-17.762 97.194,-17.762 100.768,-21.336 v1(106.172,-21.336) ; J7.23 122.682,-22.479 127.254,-27.051 v1(127.508,-27.051)
  Bottom Layer, Bottom w0.381: Q2.1 57.377,-17.846 R28.2
CPU_PW_ON: C11.2 D27.2 J7.22 | length 62.1
  Bottom Layer, Bottom w0.254: C11.2@62.23,-21.308 96.167,-21.308 97.72,-22.86 118.74,-22.86 119.621,-21.979 J7.22
  Bottom Layer, Bottom w0.381: D27.2 62.193,-21.336 C11.2
E1A: C13.2 ENCODER_MAIN.3 J7.40 | length 56.2
  Top Layer, Top w0.23: v1(122.22,-58.49) 122.22,-34.498 v1(123.317,-33.401)
  Top Layer, Top w0.254: ENCODER_MAIN.3 145.92,-57.541 C13.2
  Bottom Layer, Bottom w0.23: J7.40 122.546,-30.979 123.317,-31.75 v1(123.317,-33.401) ; v1(122.22,-58.49) 144.64,-58.49 ENCODER_MAIN.3
E1B: C12.2 ENCODER_MAIN.4 J7.41 | length 60.6
  Top Layer, Top w0.23: v1(117.8,-34) 117.6,-34.2 117.6,-35.4 117.8,-35.6 117.8,-53 118.11,-53.31 118.11,-60.11 119.4,-61.4 123.545,-61.4 v1(124.96,-59.985)
  Top Layer, Top w0.254: C12.2 140.516,-59.77 ENCODER_MAIN.4
  Bottom Layer, Bottom w0.23: v1(117.8,-34) 117.8,-33.4 119.689,-31.511 121.111,-31.511 J7.41 ; v1@124.975,-60 v1(124.96,-59.985) 124.945,-59.97 143.18,-59.97 ENCODER_MAIN.4
E2A: C2.2 ENC2.3 J7.37 R17.1 | length 106.9
  Top Layer, Top w0.23: R17.1 37.663,-45.4 46.872,-45.4 50.519,-41.754 104.677,-41.754 113.919,-32.512 v1(124.46,-32.512)
  Top Layer, Top w0.254: R17.1 34.781,-40.618 34.381,-40.218 34.381,-39.019 34.8,-38.6 34.8,-37.363 ENC2.3
  Bottom Layer, Bottom w0.23: J7.37 122.279,-29.479 124.46,-31.66 v1(124.46,-32.512)
E2B: C1.2 ENC2.5 J7.38 R18.1 | length 94.2
  Top Layer, Top w0.23: ENC2.5 39.94,-38.34 40.6,-39 40.6,-40.199 C1.2@40.581,-40.218 ; R18.1 40.373,-42.973 42.047,-44.647 46.553,-44.647 49.876,-41.324 104.081,-41.324 113.405,-32 116.8,-32 v1(118.6,-30.2)
  Top Layer, Top w0.254: R18.1@40.081,-42.618 40.581,-42.118 C1.2@40.581,-40.218
  Bottom Layer, Bottom w0.23: v1(118.6,-30.2) 118.349,-30.2 118.57,-29.979 J7.38
E2S: ENC2.2 J7.39 R19.1 | length 137.2
  Top Layer, Top w0.23: ENC2.2 34.95,-22.607 R19.1 ; v1(116.6,-33.6) 116.6,-34.4 117,-34.8 v1(117,-55.4)
  Bottom Layer, Bottom w0.23: ENC2.2 36.963,-24.8 51.35,-24.8 59.38,-32.83 59.38,-32.85 59.4,-32.87 59.4,-51.567 62.833,-55 84.2,-55 84.6,-55.4 v1(117,-55.4) ; v1(116.6,-33.6) 116.895,-33.6 120.016,-30.479 J7.39
GND: ACCUM.1 C1.1 C2.1 C3.2 C4.2 C5.2 C6.2 C7.2 C8.2 C9.2 C10.2 C11.1 C12.1 C13.1 C14.1 C15.1 C16.1 C17.1 C18.1 C19.1 C20.1 C21.1 C22.1 C23.1 C24.1 C25.1 C26.1 C27.1 ENC2.1 ENC2.4 ENCODER_MAIN.1 ESP-8266.1 J2.6 J2.9 J2.10 J2.11 J2.12 J2.13 J2.14 J7.27 J7.28 J7.44 J7.45 J7.46 J7.47 LCD-MODULE.35 LCD-MODULE.36 MOTHERBOARD.1 Q2.2 R1.3 R2.3 R20.1 R21.1 R22.1 R28.1 RF-UNIT.1 S1.3 S1.4 S2.3 S2.4 S3.3 S3.4 S4.3 S4.4 S5.3 S5.4 S6.3 S6.4 S7.3 S7.4 S8.3 S8.4 S9.3 S9.4 S10.3 S10.4 S11.3 S11.4 S12.3 S12.4 S13.3 S13.4 S14.3 S14.4 S15.3 S15.4 S16.3 S16.4 S17.3 S17.4 S18.3 S18.4 S19.3 S19.4 S20.3 S20.4 S21.3 S21.4 S22.3 S22.4 S23.3 S23.4 T1.LCG1 T1.LCG2 T1.LCG3 U1.9 U1.14 U2.9 U2.14 U3.9 U3.14 | length 106.1
  Top Layer, Top w0.254: C2.1@36.281,-40.218 37.4,-40.218 ; ENC2.4 37.4,-40.218 ; C1.1@38.681,-40.218 37.4,-40.218 ; C27.1 110.55,-71.45 S14.4
  Top Layer, Top w0.5: C14.1 148.75,-13.4 S23.4
  Bottom Layer, Bottom w0.2: J7.45 121.143,-33.3 J7.44
  Bottom Layer, Bottom w0.23: v1(116.205,-25.019) v1@116.245,-24.979 ; J7.28 v1@116.245,-24.979 ; J7.27 116.745,-24.479 v1@116.245,-24.979 ; C16.1 S23.4
  Bottom Layer, Bottom w0.254: S5.3 S5.4 S6.3 ; S1.4 S1.3 S2.4 S2.3 S3.4 S3.3 S4.4 S4.3 ; S7.3 S7.4 S8.3 S8.4
  Bottom Layer, Bottom w0.5: Q2.2 55.683,-19.519 R28.1 ; U1.14 62.651,-47.949 63,-47.6 64.294,-47.6 v1(64.389,-47.695)
  Bottom Layer, Bottom w2: 43.429,-3.621 43.434,-3.626
  other v1: 12.8,-73.8 37.6,-73.8 46.6,-73.603 180.34,-73.603 6.636,-73.222 137.287,-73.095 168,-64.2 171.287,-62.495 54.61,-61.157 116.8,-61 65.6,-54 121.2,-53.2 77.089,-51.886 98,-51.884 104.648,-50.419 112,-49.219 94,-46 75.692,-43.123 134.2,-41.2 6.4,-41 123.698,-40.386 103.251,-39.948 17.145,-39.44 50.927,-36.011 115.824,-30.988 110,-25.4 65.024,-23.819 48.641,-23.114 17.018,-19.882 102.743,-17.85 183.2,-16.6 153.8,-2
  other v3: 3,-73.07 184,-73.07 3,-4.07 184,-4.07
  other v4: 163.9,-52.57 151.776,-31.57 176.024,-31.57
  other v6: 163.9,-38.57
MISO: J2.7 J7.29 U1.12 U2.12 U3.12 | length 162.7
  Top Layer, Top w0.254: v1(157.4,-57) 160.8,-60.4 v1(173,-60.4)
  Bottom Layer, Bottom w0.23: U1.12 66.401,-45.409 69.991,-49 87.249,-49 ; U2.12 87.249,-49 ; U3.12 110.4,-52.065 110.4,-45.8 ; J7.29 122.443,-25.479 124.412,-25.479 129.286,-30.353 129.286,-35.306 130.556,-36.576 130.556,-45.72 ; v1(157.4,-57) 156,-57 155.46,-57.54 133.924,-57.54 130.556,-54.172 130.556,-45.72 ; v1(173,-60.4) 174.575,-60.4 J2.7 ; 87.249,-49 96.6,-49 99.973,-45.627 108.651,-45.627 108.744,-45.72 110.4,-45.72 130.556,-45.72
MOSI: J7.30 R24.2 U1.11 U2.11 U3.11 | length 154.3
  Top Layer, Top w0.254: v1(85.979,-50.292) 86.106,-50.165 86.106,-48.26 v1(86.233,-48.133) ; v1(129.159,-44.774) 129,-44.933 129,-49.8 127.8,-51 127.8,-57.131 132.715,-62.046 157.849,-62.046 158.425,-61.47 v1(158.7,-61.47)
  Top Layer, Top w0.381: v1(109.2,-46.8) v1(109.2,-44.8)
  Bottom Layer, Bottom w0.23: U1.11 65.939,-44.139 70.01,-48.21 86.233,-48.21 96.46,-48.21 99.095,-45.575 99.896,-44.774 109.2,-44.774 114.2,-44.774 v1(129.159,-44.774) ; 114.2,-44.744 114.2,-28.6 116.821,-25.979 J7.30
  Bottom Layer, Bottom w0.254: U2.11 v1(85.979,-50.292) ; U3.11@109.2,-51.995 v1(109.2,-46.8) ; v1(158.7,-61.47) 160.7,-61.47 R24.2
NetD25_1: D25.1 D27.1 R27.1 S15.1 S15.2 | length 88.6
  Bottom Layer, Bottom w0.254: S15.2@15.061,-4.297 8.561,-4.297 1.651,-11.207 1.651,-19.501 3.232,-21.082 D27.1@56.516,-21.082 ; 38.266,-21.043 R27.1 ; 46.991,-21.081 D25.1
NetD25_2: D25.2 Q1.1 Q2.3 R26.1 | length 12.4
  Bottom Layer, Bottom w0.254: R26.1 R26.1@43.96,-15.043
  Bottom Layer, Bottom w0.381: R26.1 47.158,-14.859 Q1.1 47.862,-14.863 49.856,-16.858 49.856,-18.611 50.041,-18.796 D25.2 Q2.3
NetD28_1: D28.1 F1.2 T1.P | length 23
  Top Layer, Top w2: F1.2 34.696,-11.542 T1.P
  Bottom Layer, Bottom w2: F1.2 31.877,-11.542 ; D28.1 31.877,-11.542 ; T1.P 36.733,-9.808 34.999,-11.542 31.877,-11.542
NetD28_2: D28.2 IN.1 IN_2.2 IN_2.3 T1.PSG | length 83.8
  Top Layer, Top w2: IN_2.2 8.843,-16.834 8.843,-14.7 10.128,-13.415 10.316,-13.415 11.509,-12.222 IN_2.3 17.119,-12.034 19.304,-9.849 19.304,-5.277 19.431,-5.15 19.431,-3.372 20.701,-2.102 34.33,-2.102 T1.PSG
  Bottom Layer, Bottom w2: IN_2.2 8.843,-16.5 8.843,-14.7 10.128,-13.415 10.128,-12.841 10.935,-12.034 IN_2.3 17.119,-12.034 19.431,-9.722 19.431,-5.277 19.431,-3.118 20.447,-2.102 31.877,-2.102 ; D28.2 31.877,-2.102 ; T1.PSG 34.33,-2.102 31.877,-2.102
NetESP-8266_4: ESP-8266.4 J7.31 | length 54.8
  Top Layer, Top w0.254: ESP-8266.4 87.979,-39.44 86.36,-39.44 84.963,-38.043 84.963,-31.312 86.487,-29.788 112.836,-29.788 116.624,-26 122.774,-26 v1(123.825,-27.051)
  Bottom Layer, Bottom w0.254: J7.31 122.443,-26.479 123.14,-26.479 123.712,-27.051 v1(123.825,-27.051)
NetESP-8266_5: ESP-8266.5 J7.32 | length 32.6
  Top Layer, Top w0.254: ESP-8266.5 111.954,-31.87 116.9,-26.924 v1(118.237,-26.924)
  Bottom Layer, Bottom w0.254: v1(118.237,-26.924) 118.292,-26.979 J7.32
NetF1_1: F1.1 IN.2 IN_2.1 | length 43.8
  Top Layer, Top w0.381: 23.241,-6.477 23.256,-6.492
  Top Layer, Top w2: IN_2.1 18.415,-16.834 23.241,-12.008 23.241,-6.477 IN.2 ; 23.256,-6.492 F1.1
  Bottom Layer, Bottom w0.381: 23.241,-6.604 23.353,-6.492
  Bottom Layer, Bottom w2: IN_2.1 18.415,-16.834 23.241,-12.008 23.241,-8.636 ; 23.241,-8.866 23.241,-8.636 ; IN.2 23.241,-6.604 23.241,-8.636 ; 23.353,-6.492 F1.1
NetF2_2: F2.2 MOTHERBOARD.2 | length 9.1
  Bottom Layer, Bottom w0.381: F2.2@84.822,-8.989 F2.2 ; MOTHERBOARD.2 MOTHERBOARD.2@90.537,-4.698
  Bottom Layer, Bottom w1: F2.2@84.925,-8.862 89.182,-8.862 90.537,-7.507 MOTHERBOARD.2@90.537,-4.698
NetJ2_2: J2.2 R22.2 R25.1 | length 29
  Bottom Layer, Bottom w0.23: R25.1@163.235,-63.135 162.7,-63.67 R25.1 163.13,-64.2 R22.2 ; R22.2@164.496,-63.896 165.792,-62.6 168.5,-62.6 170.9,-65 176.065,-65 177.8,-63.265 177.8,-56.8 175.925,-54.925 J2.2
NetJ2_3: J2.3 R21.2 R24.1 | length 27.9
  Bottom Layer, Bottom w0.23: R21.2 162.8,-59.65 162.8,-60.66 ; R24.1 162.8,-60.66 ; J2.3 176.025,-56.025 177.37,-57.37 177.37,-63.03 175.895,-64.505 171.105,-64.505 167.26,-60.66 162.8,-60.66
NetJ2_5: J2.5 R20.2 R23.1 | length 6.2
  Bottom Layer, Bottom w0.381: R23.1@168.55,-58.6 168.9,-58.25 R20.2 170.225,-58.225 J2.5
NetJ7_1: J7.1 LCD-MODULE.21 | length 35.3
  Bottom Layer, Bottom w0.254: J7.1 122.443,-11.479 128.495,-11.479 133.8,-16.784 133.8,-29.095 v1(134.62,-29.915) 135.638,-29.915 LCD-MODULE.21
NetJ7_2: J7.2 LCD-MODULE.19 | length 44.7
  Top Layer, Top w0.254: v1(117.348,-9.214) 129.159,-9.214 v1(130.556,-10.611)
  Bottom Layer, Bottom w0.254: v1(117.348,-9.214) 118.491,-10.357 118.491,-11.176 119.294,-11.979 J7.2 ; v1(130.556,-10.611) 130.556,-12.356 134.4,-16.2 134.4,-27.409 138.555,-31.564 LCD-MODULE.19
NetJ7_3: J7.3 LCD-MODULE.20 | length 37.3
  Top Layer, Top w0.254: v1(133.477,-30.931) 137.922,-30.931 138.466,-30.387 141.19,-30.387 LCD-MODULE.20
  Bottom Layer, Bottom w0.254: J7.3 122.443,-12.479 128.233,-12.479 133.2,-17.446 133.2,-30.654 v1(133.477,-30.931)
NetJ7_4: J7.4 LCD-MODULE.26 | length 55.7
  Top Layer, Top w0.254: v1(117.348,-11.881) 130.81,-11.881 v1(131.826,-10.865)
  Bottom Layer, Bottom w0.254: v1(117.348,-11.881) 118.446,-12.979 J7.4 ; v1(131.826,-10.865) 131.826,-12.805 135,-15.979 135,-26.446 138.755,-30.201 143.001,-30.201 144,-31.2 144,-37.551 LCD-MODULE.26
NetJ7_5: J7.5 LCD-MODULE.22 | length 38.1
  Top Layer, Top w0.254: v1(132.334,-32.074) 133.187,-32.927 141.19,-32.927 LCD-MODULE.22
  Bottom Layer, Bottom w0.254: J7.5 122.443,-13.479 128.033,-13.479 132.334,-17.78 v1(132.334,-32.074)
NetJ7_6: J7.6 LCD-MODULE.18 | length 44.1
  Top Layer, Top w0.254: v1(117.348,-13.843) 130.245,-13.843 132.88,-11.209 132.88,-10.992 v1(133.096,-10.992)
  Bottom Layer, Bottom w0.254: v1(117.348,-13.843) 117.484,-13.979 J7.6 ; v1(133.096,-10.992) 133.096,-13.296 135.6,-15.8 135.6,-24.475 138.858,-27.733 141.076,-27.733 LCD-MODULE.18
NetJ7_7: J7.7 LCD-MODULE.17 | length 37.9
  Top Layer, Top w0.254: v1(131.445,-33.344) 131.445,-31.555 133.976,-29.024 LCD-MODULE.17
  Bottom Layer, Bottom w0.254: J7.7 122.443,-14.479 127.128,-14.479 131.445,-18.796 v1(131.445,-33.344)
NetJ7_8: J7.8 LCD-MODULE.16 | length 44.9
  Top Layer, Top w0.254: v1(116.2,-15) 130.485,-15 134.15,-11.336 134.15,-11.119 v1(134.366,-11.119)
  Bottom Layer, Bottom w0.254: v1(116.2,-15) 116.221,-14.979 J7.8 ; v1(134.366,-11.119) 134.366,-13.766 136.2,-15.6 136.2,-22.6 138.868,-25.268 141.15,-25.268 LCD-MODULE.16
NetJ7_9: J7.9 LCD-MODULE.15 | length 40.5
  Top Layer, Top w0.254: v1(130.556,-34.487) 130.556,-31.527 135.342,-26.74 139.571,-26.74 LCD-MODULE.15
  Bottom Layer, Bottom w0.254: J7.9 122.443,-15.479 126.66,-15.479 130.556,-19.375 v1(130.556,-34.487)
NetJ7_10: J7.10 LCD-MODULE.14 | length 40.4
  Top Layer, Top w0.254: v1(117.4,-16) 130.755,-16 135.382,-11.373 v1(135.89,-11.373)
  Bottom Layer, Bottom w0.254: v1(117.4,-16) 117.421,-15.979 J7.10 ; v1(135.89,-11.373) 136.198,-11.681 136.198,-14.052 137.4,-15.254 137.4,-20.642 139.339,-22.581 141.004,-22.581 LCD-MODULE.14
NetJ7_11: J7.11 LCD-MODULE.13 | length 29.6
  Top Layer, Top w0.254: v1(126.8,-17.526) 130.499,-17.526 v1(135.255,-12.77)
  Bottom Layer, Bottom w0.254: J7.11 122.443,-16.479 125.064,-16.479 126.111,-17.526 v1(126.8,-17.526) ; v1(135.255,-12.77) 135.255,-14.013 136.8,-15.558 136.8,-20.917 LCD-MODULE.13
NetJ7_12: J7.12 LCD-MODULE.12 | length 43.8
  Top Layer, Top w0.254: v1(116.507,-17.526) 123.952,-17.526 125.661,-19.235 131.247,-19.235 137.922,-12.56 v1(137.922,-11.373)
  Bottom Layer, Bottom w0.254: v1(116.507,-17.526) 117.384,-17.526 117.931,-16.979 J7.12 ; v1(137.922,-11.373) 137.922,-11.539 138.468,-12.085 138.468,-19.17 139.434,-20.136 141.099,-20.136 LCD-MODULE.12
NetJ7_13: J7.13 LCD-MODULE.11 | length 29.1
  Top Layer, Top w0.254: v1(128.4,-18.4) 130.895,-18.4 v1(137.033,-12.262)
  Bottom Layer, Bottom w0.254: J7.13 122.443,-17.479 125.175,-17.479 126.096,-18.4 v1(128.4,-18.4) ; v1(137.033,-12.262) 137.922,-13.151 137.922,-19.499 LCD-MODULE.11
NetJ7_14: J7.14 LCD-MODULE.3 | length 30.9
  Top Layer, Top w0.254: v1(117.221,-18.669) 123.952,-18.669 125.083,-19.8 131.324,-19.8 139.827,-11.297 LCD-MODULE.3
  Bottom Layer, Bottom w0.254: v1(117.221,-18.669) 117.482,-18.669 118.172,-17.979 J7.14
NetJ7_15: J7.15 LCD-MODULE.4 | length 26.1
  Top Layer, Top w0.254: v1(127.6,-20.8) 131.147,-20.8 139.525,-12.421 141.19,-12.421 LCD-MODULE.4
  Bottom Layer, Bottom w0.254: J7.15 122.443,-18.479 124.905,-18.479 127.226,-20.8 v1(127.6,-20.8)
NetJ7_16: J7.16 LCD-MODULE.5 | length 29.3
  Top Layer, Top w0.254: v1(118,-19.8) 123.813,-19.8 125.648,-21.635 131.527,-21.635 139.378,-13.784 LCD-MODULE.5
  Bottom Layer, Bottom w0.254: v1(118,-19.8) 118.8,-19 118.8,-18.979 J7.16
NetJ7_17: J7.17 LCD-MODULE.6 | length 26.2
  Top Layer, Top w0.254: v1(127.381,-22.606) 131.594,-22.606 139.087,-15.113 141.097,-15.113 LCD-MODULE.6@142.367,-13.843 ; LCD-MODULE.6 LCD-MODULE.6@142.367,-13.726
  Bottom Layer, Bottom w0.254: J7.17 122.443,-19.479 124.254,-19.479 v1(127.381,-22.606)
NetJ7_18: J7.18 LCD-MODULE.7 | length 32.4
  Top Layer, Top w0.254: v1(116.486,-20.8) 123.67,-20.8 126.311,-23.441 131.959,-23.441 139.076,-16.324 LCD-MODULE.7
  Bottom Layer, Bottom w0.254: v1(116.486,-20.8) 118.4,-20.8 119.221,-19.979 J7.18
NetJ7_19: J7.19 LCD-MODULE.8 | length 26.4
  Top Layer, Top w0.254: v1(127.4,-24.4) 132.4,-24.4 139.147,-17.653 141.097,-17.653 LCD-MODULE.8@142.367,-16.383 ; LCD-MODULE.8 LCD-MODULE.8@142.367,-16.266
  Bottom Layer, Bottom w0.254: J7.19 122.443,-20.479 123.73,-20.479 127.4,-24.149 v1(127.4,-24.4)
NetJ7_20: J7.20 LCD-MODULE.9 | length 30.2
  Top Layer, Top w0.254: v1(117.6,-21.8) 123.4,-21.8 126.835,-25.235 127.984,-25.235 128.219,-25 133.691,-25 LCD-MODULE.9
  Bottom Layer, Bottom w0.254: v1(117.6,-21.8) 118.499,-21.8 119.32,-20.979 J7.20
NetJ7_21: J7.21 LCD-MODULE.10 | length 27.4
  Top Layer, Top w0.254: v1(128.6,-26) 135.943,-26 139.176,-22.767 140.752,-22.767 141.097,-22.422 141.097,-20.134 LCD-MODULE.10
  Bottom Layer, Bottom w0.254: J7.21 122.571,-21.479 127.092,-26 v1(128.6,-26)
NetR1_2: R1.2 U2.7 | length 105.9
  Bottom Layer, Bottom w0.23: R1.2 6.815,-23.906 9.109,-26.2 51.09,-26.2 53.027,-28.136 53.046,-28.136 58.2,-33.291 58.2,-52.4 64.76,-58.96 84.455,-58.96 84.633,-58.782 84.633,-57.513 U2.7
NetR2_2: R2.2 U2.8 | length 88.6
  Bottom Layer, Bottom w0.23: R2.2 22.015,-24.015 23.47,-25.47 51.181,-25.47 53.267,-27.556 53.286,-27.556 58.8,-33.07 58.8,-52.025 65.215,-58.44 83.165,-58.44 83.165,-58.411 83.439,-58.137 U2.8
NetR3_1: R3.1 S1.1 S1.2 U1.8 | length 59.7
  Top Layer, Top w0.23: R3.1@2.345,-44.67 2.345,-47.62 S1.1@2.545,-47.82
  Bottom Layer, Bottom w0.23: S1.1 S1.2
  Bottom Layer, Bottom w0.254: S1.2 15.046,-41.599 U1.8
NetR4_1: R4.1 S2.1 S2.2 U1.7 | length 46.6
  Top Layer, Top w0.23: R4.1 11.895,-47.82 S2.1@14.545,-47.82
  Bottom Layer, Bottom w0.254: S2.1 S2.2 24.845,-43.8 49.091,-43.8 50.022,-42.869 U1.7
NetR5_1: R5.1 S3.1 S3.2 U1.6 | length 33.6
  Top Layer, Top w0.23: R5.1@24.345,-47.77 26.495,-47.77 S3.1@26.545,-47.82
  Bottom Layer, Bottom w0.23: S3.1 S3.2
  Bottom Layer, Bottom w0.254: S3.2 33.05,-47.75 35.8,-45 50.6,-45 51.461,-44.139 U1.6
NetR6_1: R6.1 S4.1 S4.2 U1.5 | length 21.2
  Top Layer, Top w0.23: R6.1@36.245,-47.77 38.495,-47.77 S4.1@38.545,-47.82
  Bottom Layer, Bottom w0.23: S4.1 S4.2
  Bottom Layer, Bottom w0.254: S4.2 46.445,-46.2 51.4,-46.2 52.191,-45.409 U1.5
NetR7_1: R7.1 S5.1 S5.2 U1.4 | length 66.4
  Top Layer, Top w0.23: S5.1@9.045,-64.4 9.045,-69.02 R7.1
  Bottom Layer, Bottom w0.254: S5.2 S5.1 10.945,-63.2 15.35,-63.2 22.35,-56.2 44.289,-56.2 53.81,-46.679 U1.4
NetR8_1: R8.1 S6.1 S6.2 U1.3 | length 55.8
  Top Layer, Top w0.23: R8.1 21.045,-69.02 S6.1@21.045,-64.4
  Bottom Layer, Bottom w0.254: S6.2 S6.1 24,-62.145 24,-58.8 26,-56.8 44.8,-56.8 53.651,-47.949 U1.3
NetR9_1: R9.1 S8.1 S8.2 U1.1 | length 30.8
  Top Layer, Top w0.23: R9.1 S8.1@45.045,-64.4
  Bottom Layer, Bottom w0.254: S8.2 S8.1 44.922,-65.278 53,-57.2 53,-53.789 U1.1
NetR10_1: R10.1 S7.1 S7.2 U1.2 | length 44.1
  Top Layer, Top w0.23: R10.1 S7.1@33.045,-64.4
  Bottom Layer, Bottom w0.254: S7.2 S7.1 35.6,-62.545 46.055,-62.545 52.2,-56.4 52.2,-51.629 54.61,-49.219 U1.2
NetR11_1: R11.1 S9.1 S9.2 U2.6 | length 39.5
  Top Layer, Top w0.23: R11.1@51.506,-67.37 S9.1@53.392,-67.37 ; S9.1@53.35,-67.482 S9.1@53.392,-67.482
  Top Layer, Top w0.254: S9.1 S9.2
  Bottom Layer, Bottom w0.23: 63.835,-62.165 65.894,-60.106 84.42,-60.106 85.19,-59.336 85.979,-58.547 U2.6
  Bottom Layer, Bottom w0.254: S9.2 59.75,-66.25 63.835,-62.165
NetR12_1: R12.1 S10.1 S10.2 U2.5 | length 30.9
  Top Layer, Top w0.23: S10.1 S10.2
  Top Layer, Top w0.254: R12.1@62.452,-67.37 64.417,-67.37 S10.1@64.949,-66.838
  Bottom Layer, Bottom w0.23: S10.2 71.25,-64.984 74.8,-61.434 84.582,-61.434 87.234,-58.782 87.234,-57.452 U2.5
NetR13_1: R13.1 S11.1 S11.2 U2.4 | length 26.2
  Top Layer, Top w0.254: R13.1 75.75,-67.25 S11.1 S11.2
  Bottom Layer, Bottom w0.254: S11.1 80.2,-62.8 84.8,-62.8 88.519,-59.081 U2.4
NetR14_1: R14.1 S12.1 S12.2 U2.3 | length 19.2
  Top Layer, Top w0.254: R14.1 87.25,-67.25 S12.1 S12.2
  Bottom Layer, Bottom w0.23: S12.1 89.789,-64.711 U2.3
NetR15_1: R15.1 S13.1 S13.2 U2.2 | length 21.7
  Top Layer, Top w0.254: R15.1@97,-67.25 98.75,-67.25 S13.1 S13.2
  Bottom Layer, Bottom w0.23: U2.2 91.059,-58.137 96.422,-63.5
  Bottom Layer, Bottom w0.254: 96.422,-63.5 99.25,-66.328 S13.1
NetR16_1: R16.1 S14.1 S14.2 U2.1 | length 31.9
  Top Layer, Top w0.254: R16.1 110.25,-67.25 S14.1 S14.2
  Bottom Layer, Bottom w0.23: U2.1 92.329,-58.137 96.549,-62.357 103.459,-62.357 105.445,-64.343 105.905,-64.803 108.803,-64.803 S14.1@109.8,-65.8
  Bottom Layer, Bottom w0.254: S14.1@109.8,-65.8 S14.1
NetR29_1: R29.1 S23.1 S23.2 U3.1 | length 87.7
  Top Layer, Top w0.23: v1(128.8,-52.2) 131.994,-52.2 132.594,-51.6 v1(132.6,-51.6) ; R29.1 S23.1@148.55,-4.45 ; S23.1 S23.2
  Bottom Layer, Bottom w0.23: U3.1 116.345,-56.6 120,-56.6 124.4,-52.2 v1(128.8,-52.2) ; v1(132.6,-51.6) 136.4,-47.8 136.4,-43 139,-40.4 143.2,-40.4 144.8,-38.8 144.8,-29.4 151.8,-22.4 151.8,-7.3 S23.1
NetR30_1: R30.1 S22.1 S22.2 U3.2 | length 94
  Top Layer, Top w0.23: v1(128.8,-53.6) 131.987,-53.6 132.387,-53.2 v1(132.6,-53.2) ; R30.1 160.05,-4.45 S22.1 S22.2
  Bottom Layer, Bottom w0.23: U3.2 114.175,-58.375 114.8,-59 116.4,-59 118.2,-57.2 120.4,-57.2 124,-53.6 v1(128.8,-53.6) ; v1(132.6,-53.2) 137.2,-48.6 137.2,-44.6 138.8,-43 143.2,-43 145.4,-40.8 145.4,-29.6 157.8,-17.2 157.8,-6.7 S22.1
NetR31_1: R31.1 S21.1 S21.2 U3.3 | length 102.9
  Top Layer, Top w0.23: v1(128.8,-55) 131.987,-55 132.387,-54.6 v1(132.6,-54.6) ; R31.1 S21.1@171.55,-4.45 ; S21.1 S21.2
  Bottom Layer, Bottom w0.23: U3.3 112.905,-58.2 114.305,-59.6 116.8,-59.6 118.6,-57.8 120.6,-57.8 123.4,-55 v1(128.8,-55) ; v1(132.6,-54.6) 137.8,-49.4 137.8,-46 138.2,-45.6 143.45,-45.6 146,-43.05 146,-30 165,-11 166.2,-11 167.4,-11 169.4,-9 169.4,-6.6 S21.1
NetR32_1: R32.1 S20.1 S20.2 U3.4 | length 71.9
  Top Layer, Top w0.23: R32.1 167.75,-67.25 S20.1@168.049,-66.951
  Bottom Layer, Bottom w0.23: U3.4 111.635,-58.835 115.2,-62.4 156,-62.4 162.555,-68.955 166.045,-68.955 S20.1
  Bottom Layer, Bottom w0.381: S20.1 S20.2
NetR33_1: R33.1 S19.1 S19.2 U3.5 | length 60.1
  Top Layer, Top w0.23: R33.1 156.25,-67.25 S19.1 S19.2
  Bottom Layer, Bottom w0.23: U3.5 110.365,-58.835 114.505,-62.975 152.975,-62.975 S19.1
NetR34_1: R34.1 S18.1 S18.2 U3.6 | length 49.8
  Top Layer, Top w0.23: R34.1 144.75,-67.25 S18.1 S18.2
  Bottom Layer, Bottom w0.23: U3.6 109.095,-58.695 114,-63.6 142.1,-63.6 S18.1
NetR35_1: R35.1 S17.1 S17.2 U3.7 | length 39.6
  Top Layer, Top w0.23: R35.1 133.25,-67.25 S17.1 S17.2
  Bottom Layer, Bottom w0.23: U3.7 107.825,-58.825 113.2,-64.2 131.2,-64.2 S17.1
NetR36_1: R36.1 S16.1 S16.2 U3.8 | length 29.5
  Top Layer, Top w0.23: R36.1 121.75,-67.25 S16.1 S16.2
  Bottom Layer, Bottom w0.23: U3.8 106.555,-58.955 112.4,-64.8 120.3,-64.8 S16.1
SD_CS: J7.34 R25.2 | length 78.4
  Top Layer, Top w0.254: v1(117.51,-28.385) 123.545,-28.385 126.492,-31.332 126.492,-59.633 130.659,-63.8 v1(159.2,-63.8)
  Bottom Layer, Bottom w0.254: v1(117.51,-28.385) 118.215,-28.385 118.621,-27.979 J7.34 ; v1(159.2,-63.8) 160.77,-63.8 R25.2
VCC12_IN: ACCUM.2 Q1.3 R26.2 R27.2 T1.LCP | length 17.4
  Bottom Layer, Bottom w0.381: R27.2 R26.2 41.733,-14.516 41.733,-9.842 T1.LCP@41.901,-9.673 ; Q1.3@46.101,-9.673 46.711,-10.283 Q1.3 Q1.3@46.552,-9.673
  Bottom Layer, Bottom w2: T1.LCP@41.901,-9.673 Q1.3@46.101,-9.673 ; ACCUM.2@46.101,-6.6 Q1.3@46.101,-9.673 ; Q1.3@46.552,-9.673 Q1.3@46.101,-9.673
pads on no net: ENC2.6 ENC2.7 ESP-8266.2 ESP-8266.3 ESP-8266.7 IN_2.4 J2.1 J2.8 LCD-MODULE.23 LCD-MODULE.24 LCD-MODULE.25 LCD-MODULE.27 LCD-MODULE.28 LCD-MODULE.29 LCD-MODULE.30 LCD-MODULE.31 LCD-MODULE.32 LCD-MODULE.33 LCD-MODULE.34 LCD-MODULE.37 R1.4 R1.5 R2.4 R2.5
copper on no net:
  other v2: 55.321,-55.567 141.221,-55.567 55.321,-5.148 141.221,-5.148

## Polygon pours and split planes (outlines as drawn)
GND on Bottom Layer, Bottom "Bottom Layer, Bottom-GND" (solid, remove dead copper, pour order 4): 0,3.4 0,-77.07 187,-77.07 186.8,-76.87 186.8,3.4
GND on Top Layer, Top "Top Layer, Top-GND" (solid, remove dead copper, pour order 6): 0,3.4 0,-77.07 187,-77.07 187,3.4

## Keep-outs
Keep-Out Layer, Board:
  lines w0.127: 0,3.4 0,-77.07 187,-77.07 187,3.4
  lines w0.14: 0,-0.07 0,-77.07 187,-77.07 187,-0.07 ; 0,3.4 187,3.4
  lines w0.254: 153.931,-43.219 cw(c163.9,-38.57) 162.941,-27.612 163.028,-28.608 ccw(c163.9,-38.57) 154.837,-42.797 153.931,-43.219 ; 154.889,-44.879 ccw(c163.9,-38.57) 172.911,-44.879 172.091,-44.306 cw(c163.9,-38.57) 155.708,-44.306 154.889,-44.879 ; 164.772,-28.608 cw(c163.9,-38.57) 172.963,-42.797 173.869,-43.219 ccw(c163.9,-38.57) 164.859,-27.612 164.772,-28.608

## Silkscreen, mask and mechanical layers (free items; w line width, h text height)
Top Overlay, Top Silk:
  circle w0.254: c164,-38.4 r19
  lines w0.254: 52.721,-57.67 46.701,-57.67 46.701,-56.4 46.701,3 143.8,3 143.721,-3.37
  text "UA3REO Transceiver" at 150,-16.2 h2.08
  text "FRONT-UNIT rev9 (T.Angelov Mod.)" at 185,-69.6 h1.25 r90
Bottom Overlay, Bot Silk:
  text "MOTHERBOARD" at 93.6,-1 h1
  text "RF-UNIT" at 103,-1 h1
  text "ACCUM" at 50.4,-4.4 h1

## Text inside footprints (layer, text, board x,y; h text height)
ENCODER_MAIN: Mechanical 2, Bot Assy "BOARD EDGE" at 149.397,-58.134 h0.42
ESP-8266: Bottom Overlay, Bot Silk "ESP8266" at 76.703,-29.417 h1.67 r90; Bottom Overlay, Bot Silk "ESP-01" at 81.483,-30.19 h1.67 r90
LCD-MODULE: Top Overlay, Top Silk "3'5 480*320" at 93.091,-37.406 h1.67